# Altium PCB Emulator.PcbDoc
Units mil, origin at the board's own origin, x right, y up, seen from the top; angles counter-clockwise.
Board outline 1270 x 2100 mil, 2 copper layers (Top Layer, Bottom Layer); 16 components, 17 nets, 65 pads, 0 vias.
Unrouted connection lines stored in the file: 2.
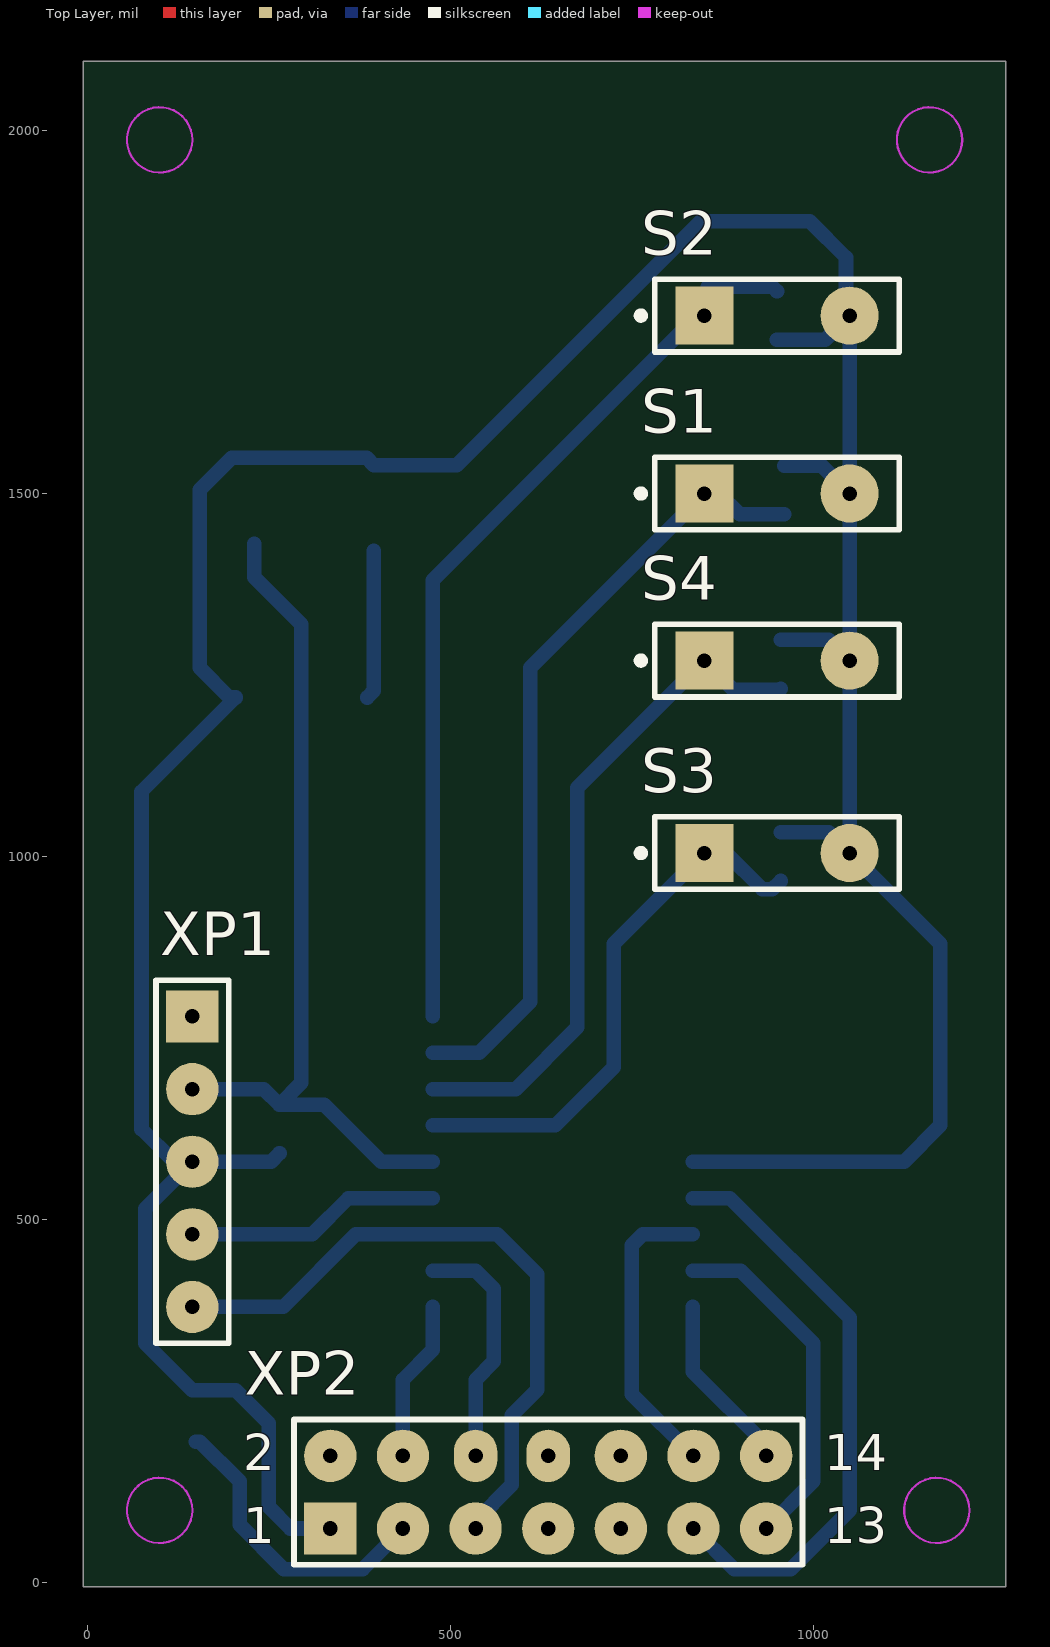
[diagram p0: Top Layer view]
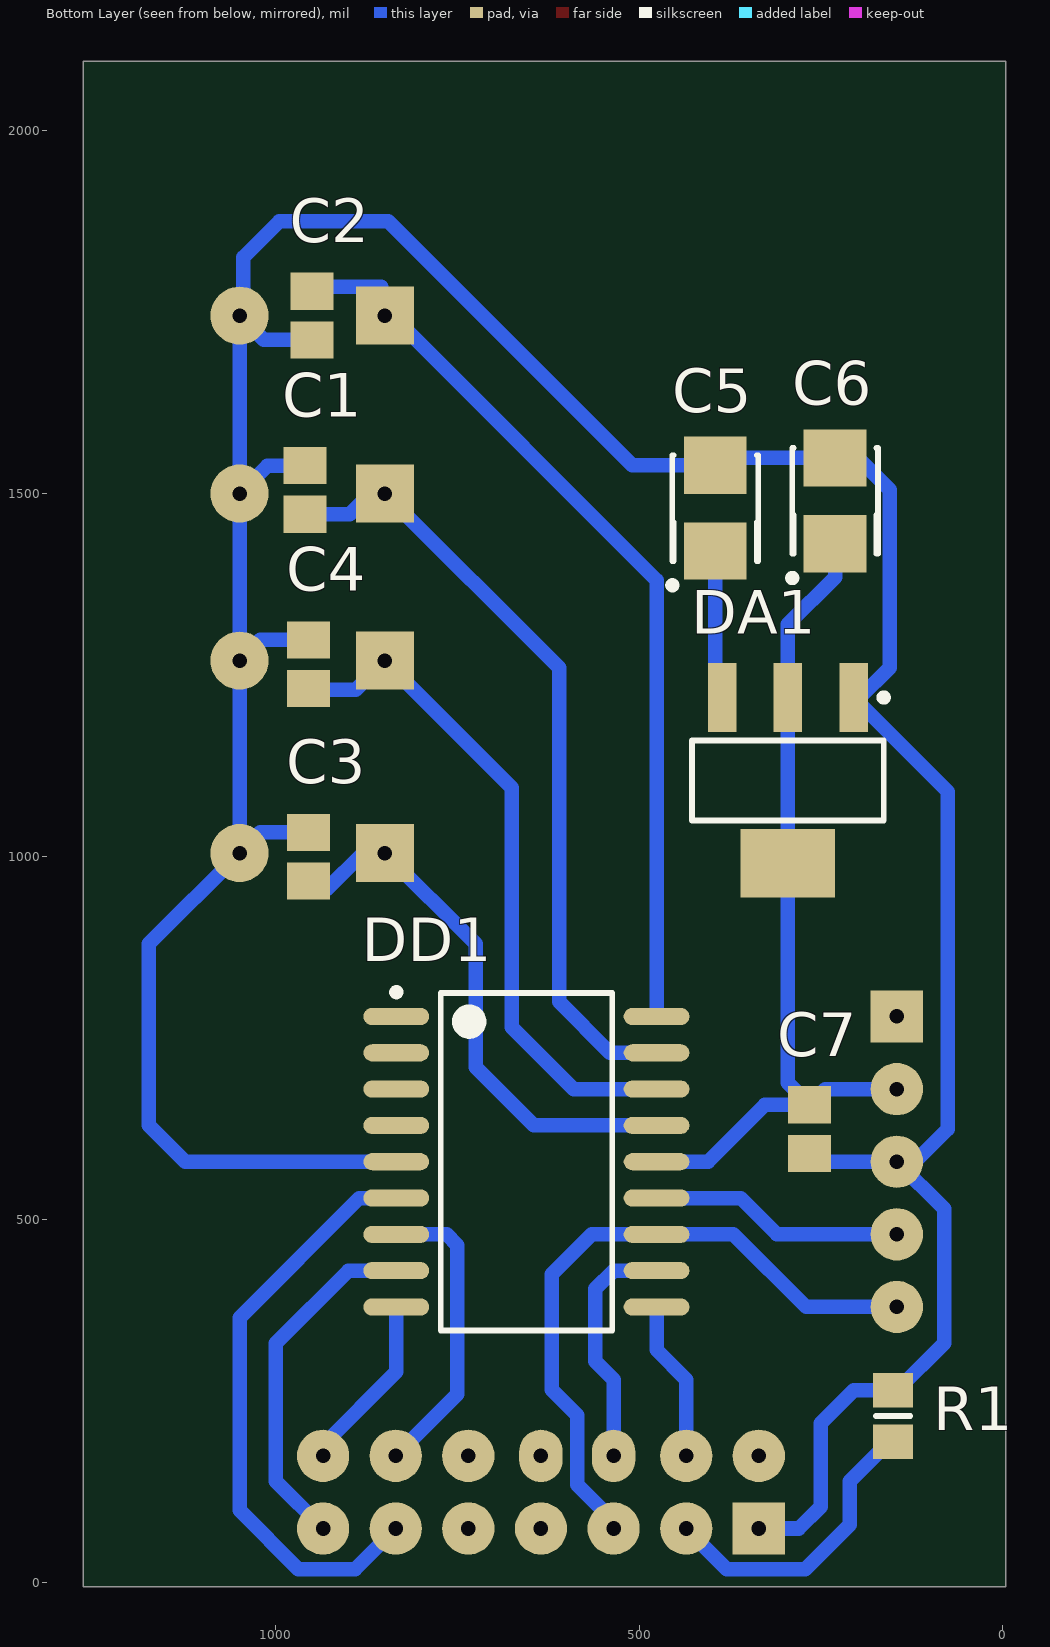
[diagram p1: Bottom Layer view, seen from below]

## Layer stack, top to bottom
Top Layer: signal copper 1.4
Dielectric: dielectric 12.6, FR-4, Dk 4.8
Bottom Layer: signal copper 1.4

## Board outline
-5,-5 -5,2095 1265,2095 1265,-5

## Design rules (kind name [scope] priority, off if disabled: settings)
Clearance [All] p1: gap=10
PolygonConnect [All] p1: connectstyle=Relief reliefconductorwidth=10 reliefentries=4 polygonreliefangle="90 Angle" airgapwidth=10
RoomDefinition Emulator [InComponentClass('Emulator')] p1: confinementstyle=ConfineIn formatcopy=TRUE lockcomponents=FALSE outline -5,-5 1265,-5 1265,2095 -5,2095
RoutingVias [All] p1: holewidth=28 width=50 viastyle="Through Hole" minholewidth=28 minwidth=50 maxholewidth=28 maxwidth=50
SolderMaskExpansion [All] p1: expansion=4
Width [All] p1: maxlimit=30 minlimit=10 preferedwidth=20
28 further rules are at their usual default settings.

## Components (designator, comment, footprint, x,y, rotation, side; value= is the part's Value field where it differs from the comment)
C1 "Cap" CAPC2012N 960,1505 r270 bottom
C2 "Cap" CAPC2012N 950,1745 r90 bottom
C3 "Cap" CAPC2012N 955,1000 r270 bottom
C4 "Cap" CAPC2012N 955,1265 r270 bottom
C5 "Cap Pol1" TC3528-1411 395,1480 r90 bottom
C6 "Cap Pol1" TC3528-1411 230,1490 r90 bottom
C7 "Cap" CAPC2012N 265,625 r90 bottom
DA1 "LD1117S50TR" SOT-223_N 295,1105 r270 bottom
DD1 "PIC16F628A-E/P" SOIC127P1030-18N 655,580 r180 bottom
R1 "es2" RESC2012N 150,230 r90 bottom
S1 "key+" SPST-2 950,1500 r0 top
S2 "key-" SPST-2 950,1745 r0 top
S3 "key>" SPST-2 950,1005 r0 top
S4 "key<" SPST-2 950,1270 r0 top
XP1 "ICSP" HDR1X5 145,780 r270 top
XP2 "WH0802" HDR2X7 335,75 r0 top

## Footprints (in the part's own frame and the unit in brackets; to place one, negate y for a bottom-side part, rotate by r counter-clockwise, add the part's x,y. Pads: shape width x height; smd on the part's side, far side on the other; paste and mask are expansions set on the pad)
CAPC2012N [mm] "Chip Capacitor, Body 2.0x1.3mm, IPC Medium Density"
  rect 1.3x1.5 smd: 1(-0.85,0) 2(0.85,0)
  body extent -1.1,-0.72 1.1,0.72, height 1.1
HDR1X5 [mil] "Connector; Header; 5 Position"
  rect 72x72 hole 20: 1(0,0)
  round 72 hole 20: 2(100,0) 3(200,0) 4(300,0) 5(400,0)
  silkscreen extent -50,-50 450,50
HDR2X7 [mil] "Connector; Header; 7x2 Position"
  rect 72x72 hole 20: 1(0,0)
  round 72 hole 20: 2(0,100) 3(100,0) 4(100,100) 5(200,0) 7(300,0) 9(400,0) 10(400,100) 11(500,0) 12(500,100) 13(600,0) 14(600,100)
  oval 60x72 hole 20: 6(200,100) 8(300,100)
  silkscreen extent -50,-50 650,150
RESC2012N [mm] "Chip Resistor, Body 2.0x1.3mm, IPC Medium Density"
  rect 1.2x1.4 smd: 1(-0.9,0) 2(0.9,0)
  silkscreen extent 0,-0.6 0,0.6, body extent -1.07,-0.7 1.07,0.7, height 0.65
SOIC127P1030-18N [mm] "SOIC, 18-Leads, Body 11.6x7.5mm, Pitch 1.27mm, IPC Medium Density"
  oval 2.3x0.6 smd: 1(-4.55,5.08) 2(-4.55,3.81) 3(-4.55,2.54) 4(-4.55,1.27) 5(-4.55,0) 6(-4.55,-1.27) 7(-4.55,-2.54) 8(-4.55,-3.81) 9(-4.55,-5.08) 10(4.55,-5.08) 11(4.55,-3.81) 12(4.55,-2.54) 13(4.55,-1.27) 14(4.55,0) 15(4.55,1.27) 16(4.55,2.54) 17(4.55,3.81) 18(4.55,5.08)
  silkscreen extent -4.67,-5.9 3,6.05, body extent -3.8,-5.95 3.8,5.95, height 2.65
SOT-223_N [mm] "SOT223, 4-Leads, Body 6.5x3.5mm, Pitch 2.3mm, Lead Span 7mm, IPC Medium Density"
  rect 2.4x1 smd: 1(-2.9,2.3) 2(-2.9,0) 3(-2.9,-2.3)
  rect 2.4x3.3 smd: 4(2.9,0)
  silkscreen extent -3.02,-3.35 1.4,3.47, body extent -1.85,-3.35 1.85,3.35, height 1.8
SPST-2 [mil] "Switch; 2 Leads"
  rect 80x80 hole 20: 1(-100,0)
  round 80 hole 20: 2(100,0)
  silkscreen extent -192,-50 169,50
TC3528-1411 [mm] "Capacitor, SM Tantalum; Body 3.5 x 2.8 mm (LxW typ)"
  rect 2x2.2 smd: 1(-1.5,0) 2(1.5,0)
  silkscreen extent -2.82,-1.5 1.85,1.63

## Part data
C1 C2 C3 C4 C7: "Capacitor"
C5 C6: "Polarized Capacitor (Radial)"
DA1: "Fixed Low Drop Positive Voltage Regulator, 5V, 4-Pin SOT-223, Tape and Reel"
DD1: "FLASH-Based 8-Bit CMOS Microcontroller with nanoWatt Technology, 2K (x14-Bit words) FLASH, 224 Bytes SRAM, 18-Pin PDIP, 3.0 to 5.5V Supply Range, Extended Temperature"
R1: library part Res2, "Resistor"
S1 S2 S3 S4: library part SW-SPST, "Single-Pole, Single-Throw Switch"
XP1: library part "Header 5", "Header, 5-Pin"
XP2: library part "Header 7X2", "Header, 7-Pin, Dual row"

## Nets (pads, with @x,y where several pads share a name; then routed paths per layer and width w, separated by ;. In a path a pad name is that pad's centre, name@x,y a point inside that pad or via, vN(x,y) a via of type N, cw(c..) or ccw(c..) an arc to the next point about the centre after c; other vN are vias at no path point)
+5: C6.1 C7.2 DA1.2 DA1.4 DD1.14 XP1.2 XP2.2 | length 1184.1
  Bottom Layer w20: XP1.2 243.46,680 C7.2 ; C6.1 230,1385 295,1320 DA1.2 DA1.4 295,688.46 C7.2 ; DD1.14 405,580 326.54,658.46 C7.2
CLK/R/W\: DD1.12 XP1.5 XP2.5 | length 924.4
  Bottom Layer w20: XP1.5 270,380 370,480 DD1.12 565,480 620,425 620,266 585,231 585,135 535,85 XP2.5
DAT/IMPULS: DD1.13 XP1.4 | length 351.6
  Bottom Layer w20: XP1.4 310,480 360,530 DD1.13
DB4: DD1.6 XP2.11 | length 821
  Bottom Layer w20: DD1.6 885,530 1050,365 1050,100 969,19 891,19 XP2.11
DB5: DD1.7 XP2.12 | length 415.6
  Bottom Layer w20: DD1.7 765,480 750,465 750,260 XP2.12
DB6: DD1.8 XP2.13 | length 489.2
  Bottom Layer w20: DD1.8 900,430 1000,330 1000,140 XP2.13
DB7: DD1.9 XP2.14 | length 246.8
  Bottom Layer w20: DD1.9 834.13,290.87 935,190 XP2.14
E: DD1.11 XP2.6 | length 334.8
  Bottom Layer w20: DD1.11 535,430 560,405 560,305 535,280 XP2.6
GND: C1.1 C2.1 C3.1 C4.1 C5.2 C6.2 C7.1 DA1.1 DD1.5 R1.2 S1.2 S2.2 S3.2 S4.2 XP1.3 XP2.1 | length 4985.5
  Bottom Layer w20: R1.2@144.78,265.22 80,330 80,515 XP1.3 ; R1.2 204.57,265.43 250,220 250,105 280,75 XP2.1 ; C7.1 253.46,580 XP1.3 ; DD1.5 1125,580 1175,630 1175,880 S3.2 ; C2.1 1016.54,1711.54 S2.2@1045,1740 ; C3.1 1021.54,1033.46 S3.2 ; C4.1 1021.54,1298.46 S4.2 ; C1.1 1011.54,1538.46 S1.2 ; XP1.3 120,580 75,625 75,1089.72 DA1.1 195.83,1219.17 155,1260 155,1505 199.06,1549.06 C6.2 385,1549.06 C5.2 509.06,1539.06 845,1875 995,1875 1045,1825 1045,1750 S2.2 S2.2@1045,1740 ; S2.2@1045,1740 1050,1735 S1.2 ; S3.2 S4.2 ; S4.2 S1.2
KEY+: C1.2 DD1.17 S1.1 | length 1084.3
  Bottom Layer w20: DD1.17 540,730 610,800 610,1260 S1.1 870,1500 898.46,1471.54 C1.2
KEY-: C2.2 DD1.18 S2.1 | length 1255.6
  Bottom Layer w20: DD1.18 475.87,1380.87 S2.1@840,1745 ; S2.1 855,1750 855,1785 943.46,1785 C2.2
KEY<: C4.2 DD1.16 S4.1 | length 934
  Bottom Layer w20: DD1.16 590,680 675,765 675,1095 S4.1 890,1230 953.46,1230 C4.2
KEY>: C3.2 DD1.15 S3.1 | length 759.5
  Bottom Layer w20: DD1.15 645,630 725,710 725,880 S3.1 880,1005 930,955 943.46,955 C3.2
NetR1_1: R1.1 XP2.3 | length 416.2
  Bottom Layer w20: R1.1 155.43,194.57 210,140 210,80 271,19 379.28,19 435,74.72 XP2.3
RS: DD1.10 XP2.4 | length 221.9
  Bottom Layer w20: XP2.4 435,280 475.87,320.87 DD1.10
VCC: C5.1 DA1.3 | length 205.7
  Bottom Layer w20: DA1.3 395,1228.62 C5.1
VPP/START: DD1.4 XP1.1
pads on no net: DD1.1 DD1.2 DD1.3 XP2.7 XP2.8 XP2.9 XP2.10

## Keep-outs
Top Layer:
  circle w3: c100,1987 r45
  circle w3: c1160,1987 r45
  circle w3: c100,100 r45
  circle w3: c1170,100 r45

## Silkscreen, mask and mechanical layers (free items; w line width, h text height)
Mechanical 1:
  lines w10: 0,0 1260,0 1260,2087 0,2087 0,0

## Text inside footprints (layer, text, board x,y; h text height)
XP2: Top Overlay "13" at 1015,55 h50; Top Overlay "14" at 1015,155 h50; Top Overlay "1" at 215,55 h50; Top Overlay "2" at 215,155 h50